# Altium PCB 2009_DFMUX_MEZZANINE_REV4_TIMEMAIL.PCBDOC (part 6 of 6)
Units mil, origin at the board's own origin, x right, y up, seen from the top; angles counter-clockwise.
Board outline 4922.86 x 3627.76 mil, 6 copper layers (Top Layer, Internal Plane 1, Mid-Layer 1, Internal Plane 2, Mid-Layer 2, Bottom Layer); 519 components, 606 nets, 2175 pads, 757 vias.
Unrouted connection lines stored in the file: 148.
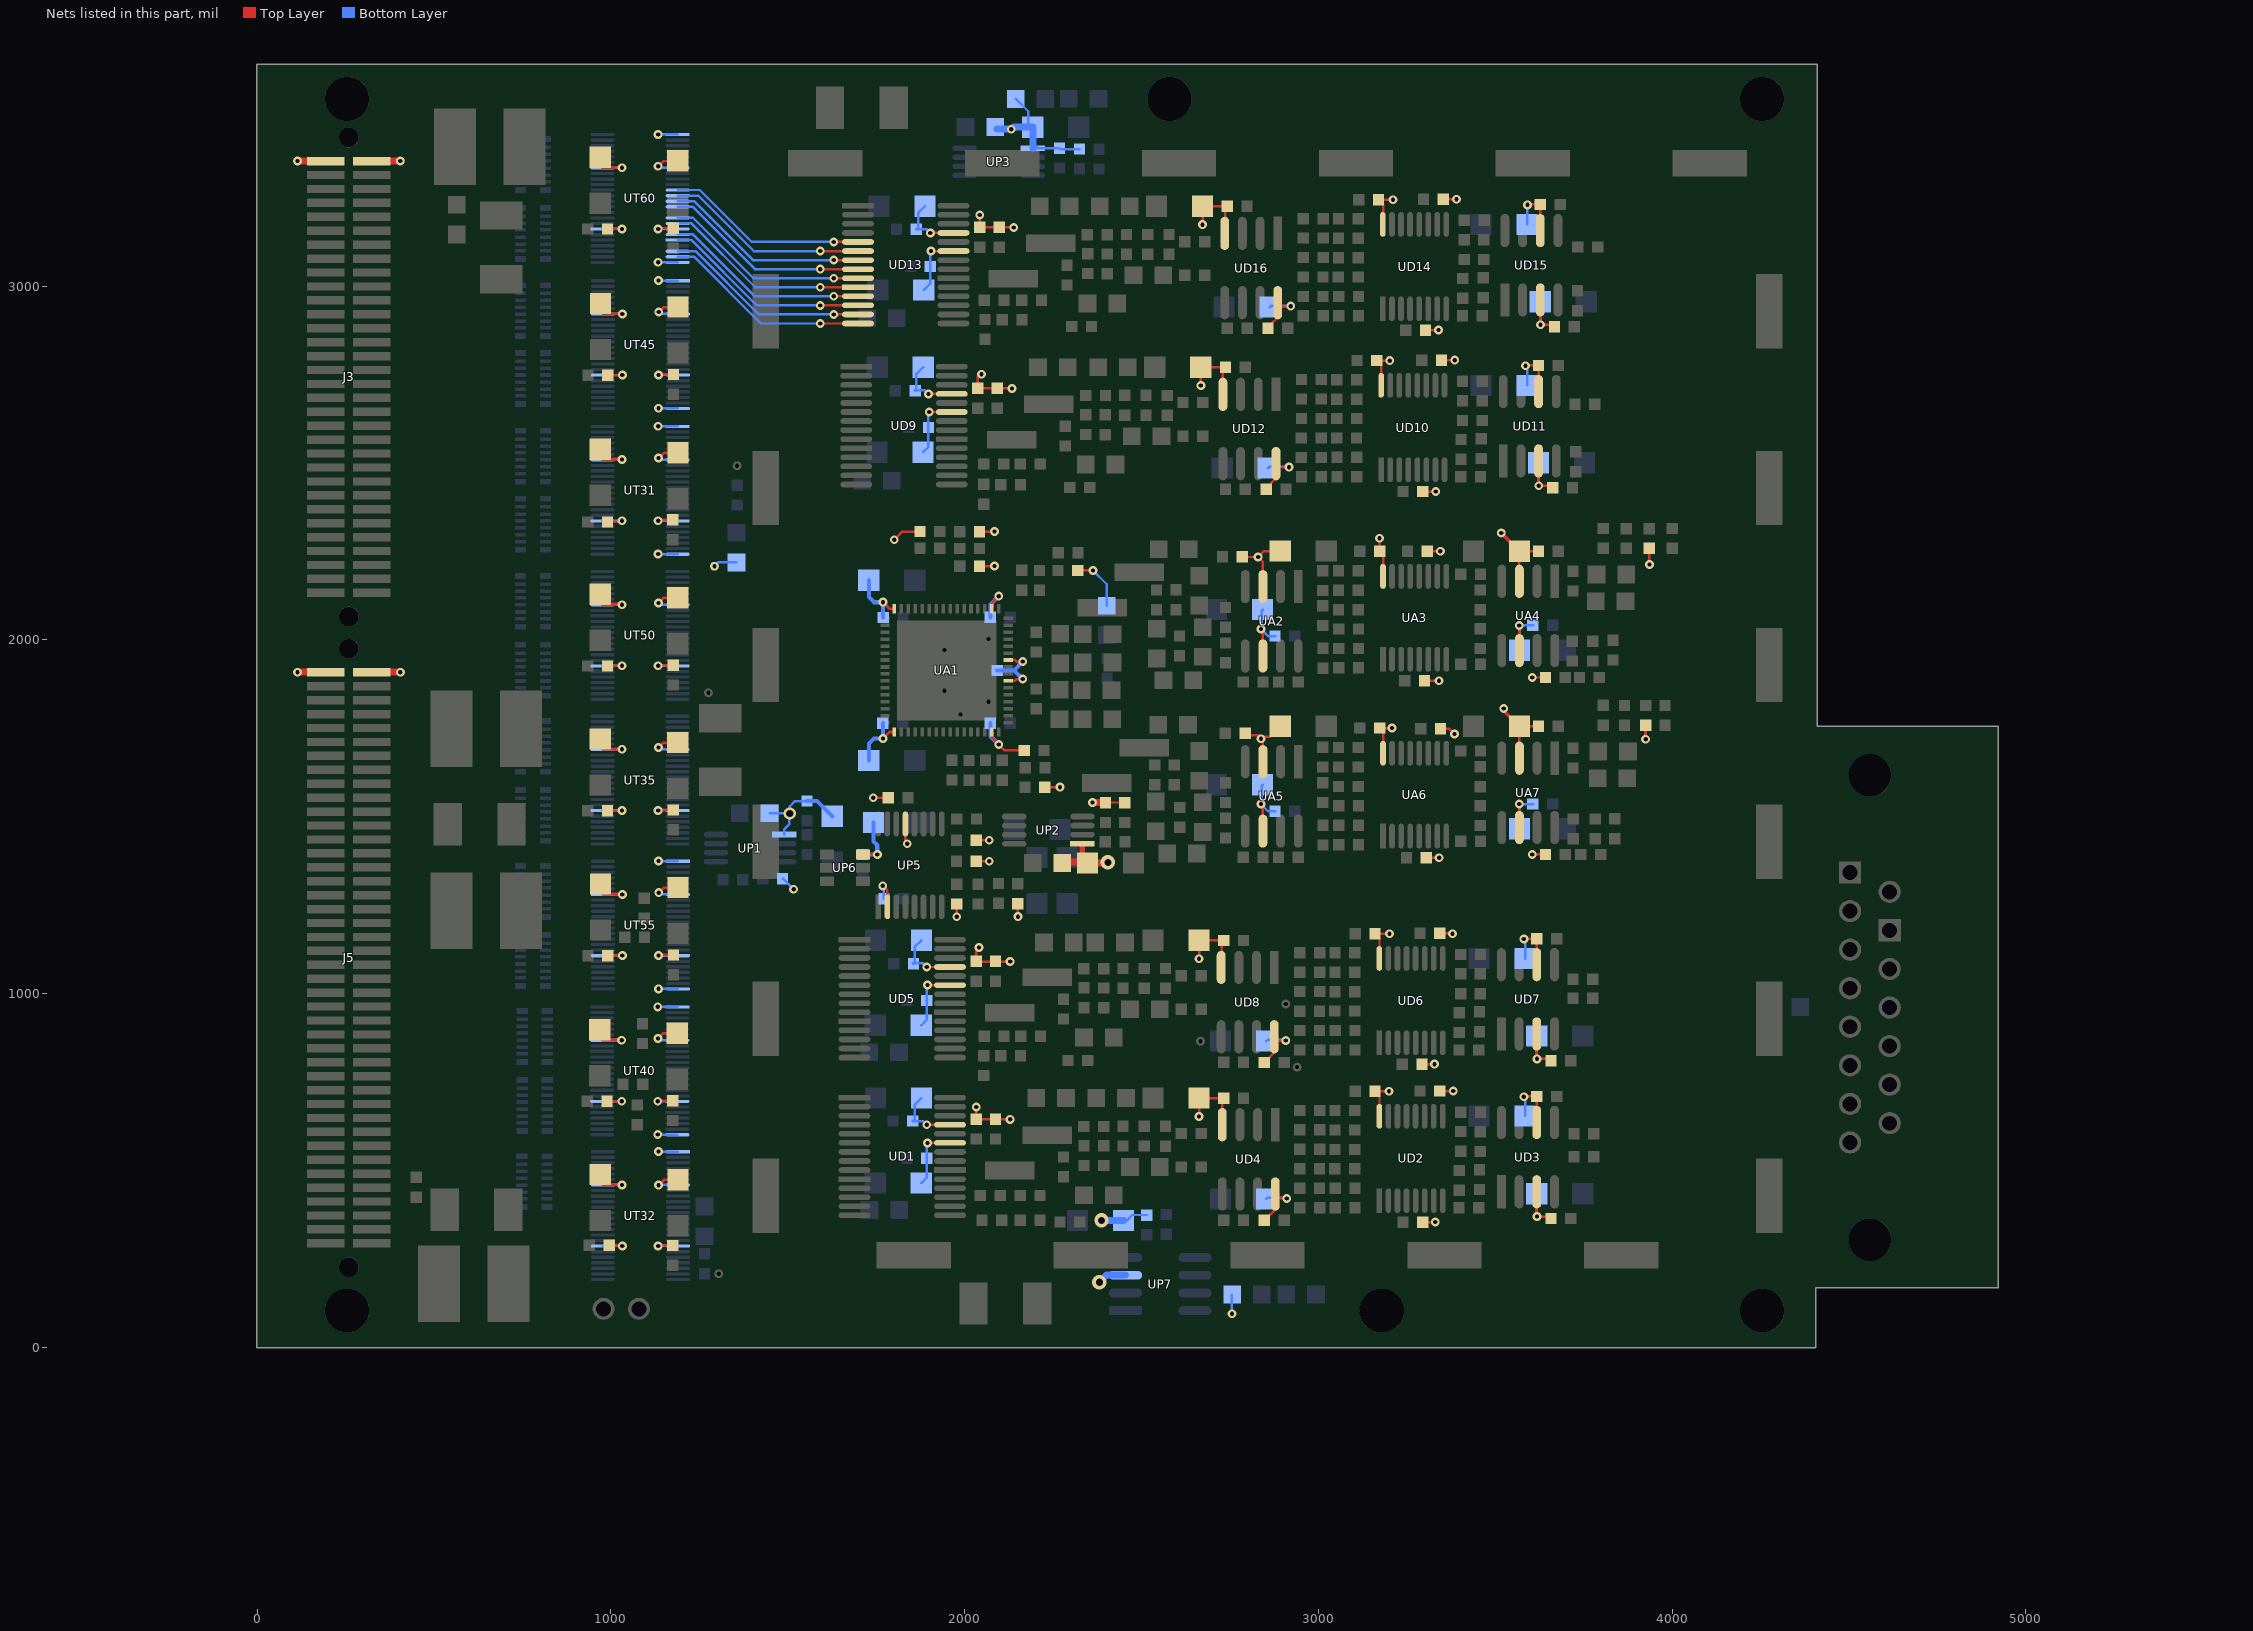
[diagram p10: the nets of this part, all layers, seen from the top]

## Via types
v1: diameter 25, hole 12, Top Layer to Bottom Layer, 692 vias
v2: diameter 40, hole 20, Top Layer to Bottom Layer, 39 vias
v3: diameter 35, hole 20, Top Layer to Bottom Layer, 23 vias
v4: diameter 22, hole 12, Top Layer to Bottom Layer, 3 vias

## Nets (pads, with @x,y where several pads share a name; then routed paths per layer and width w, separated by ;. In a path a pad name is that pad's centre, name@x,y a point inside that pad or via, vN(x,y) a via of type N, cw(c..) or ccw(c..) an arc to the next point about the centre after c; other vN are vias at no path point) (continued)
TRAN4_DATA6: UD13.5 UT60.11 | length 571.3
  Top Layer w7: v1(1630.1,3124.43) UD13.5@1699.03,3124.43
  Bottom Layer w7: UT60.11@1188.63,3271.37 1251.27,3271.37 1398.2,3124.43 v1(1630.1,3124.43)
TRAN4_DATA7: UD13.6 UT60.12 | length 575.4
  Top Layer w7: v1(1591.77,3098.83) UD13.6@1699.03,3098.83
  Bottom Layer w7: UT60.12@1188.63,3255.67 1246.97,3255.67 1403.8,3098.83 v1(1591.77,3098.83)
TRAN4_DATA8: UD13.7 UT60.13 | length 579.5
  Top Layer w7: v1(1630.1,3073.23) UD13.7@1699.03,3073.23
  Bottom Layer w7: UT60.13@1188.63,3239.97 1234.67,3239.97 1401.4,3073.23 v1(1630.1,3073.23)
TRAN4_DATA9: UD13.8 UT60.14 | length 583.6
  Top Layer w7: v1(1591.77,3047.63) UD13.8@1699.03,3047.63
  Bottom Layer w7: UT60.14@1188.63,3224.27 1230.37,3224.27 1407,3047.63 v1(1591.77,3047.63)
TRAN4_DATA10: UD13.9 UT60.16 | length 581.2
  Top Layer w7: v1(1630.1,3022.03) UD13.9@1699.03,3022.03
  Bottom Layer w7: UT60.16@1188.63,3192.87 1231.77,3192.87 1402.6,3022.03 v1(1630.1,3022.03)
TRAN4_DATA11: UD13.10 UT60.17 | length 585.3
  Top Layer w7: v1(1591.77,2996.43) UD13.10@1699.03,2996.43
  Bottom Layer w7: UT60.17@1188.63,3177.17 1227.47,3177.17 1408.2,2996.43 v1(1591.77,2996.43)
TRAN4_DATA12: UD13.11 UT60.19 | length 582.9
  Top Layer w7: v1(1630.1,2970.83) UD13.11@1699.03,2970.83
  Bottom Layer w7: UT60.19@1188.63,3145.77 1231.87,3145.77 1406.8,2970.83 v1(1630.1,2970.83)
TRAN4_DATA13: UD13.12 UT60.20 | length 587
  Top Layer w7: v1(1591.77,2945.23) UD13.12@1699.03,2945.23
  Bottom Layer w7: UT60.20@1188.63,3130.07 1227.57,3130.07 1412.4,2945.23 v1(1591.77,2945.23)
TRAN4_DATA14: UD13.13 UT60.22 | length 584.6
  Top Layer w7: v1(1630.1,2919.63) UD13.13@1699.03,2919.63
  Bottom Layer w7: UT60.22@1188.63,3098.67 1238.97,3098.67 1418,2919.63 v1(1630.1,2919.63)
TRAN4_DATA15: UD13.14 UT60.23 | length 588.7
  Top Layer w7: v1(1591.77,2894.03) UD13.14@1699.03,2894.03
  Bottom Layer w7: UT60.23@1188.63,3082.97 1234.67,3082.97 1423.6,2894.03 v1(1591.77,2894.03)
VCC3VP: CA4.1 CA15.1 CA18.1 CA27.1 CP8.2 CP10.1 CP19.2 DP2.1 RA9.2 RA44.2 RP9.1 RP11.2 RP31.1 UA1.7 UA1.10 UA1.18 UA1.63 UP2.1 UP5.2 | length 1203.7
  Top Layer w7: v1(1768.63,1304.37) 1781.53,1291.47 UP5.2@1781.53,1245.8 ; v1(1977.63,1217) RP31.1@1977.63,1253.37 ; v1(2096.5,1703.91) 2113.05,1687.37 CA27.1@2168.63,1687.37 ; UA1.7@2123.35,1884.11 2141.97,1884.11 2146.77,1888.91 v1(2164.27,1888.91) ; UA1.10@2123.35,1943.17 2141.97,1943.17 2146.77,1938.37 v1(2164.27,1938.37) ; RA44.2@2226.77,1583.37 v1(2269.27,1583.37) ; RP11.2@2276.63,1369 RP11.2@2279.63,1372 ; RA9.2@2320.27,2195.87 v1(2362.77,2195.87) ; CP10.1@2332.63,1371 2347.63,1369 CP10.1@2344.63,1372 ; CP8.2@2397.63,1540 2451.63,1540 RP9.1@2452.63,1539 ; v2(2404.63,1371) v2@2406.63,1369
  Top Layer w8: UA1.63@2077.09,1739.43 2077.09,1723.32 v1(2096.5,1703.91) ; UA1.18@2077.09,2087.85 2077.09,2103.95 v1(2096.5,2123.37)
  Top Layer w15: CP10.1@2332.63,1372 UP2.1@2332.63,1424
  Top Layer w20: RP11.2@2279.63,1372 CP10.1@2332.63,1372 ; CP10.1@2332.63,1371 CP10.1@2332.63,1372 ; CP10.1@2344.63,1372 CP10.1@2332.63,1372 ; CP10.1@2347.63,1369 v2@2406.63,1369 ; v1(2361.63,1540) CP8.2@2397.63,1540
  Bottom Layer w7: v1(1768.63,1304.37) 1771.63,1301.37 CP19.2@1771.63,1268.37 ; v1(2362.77,2195.87) 2401.63,2157 ; 2401.63,2157 2401.63,2096 2401.63,2157
  Bottom Layer w12: CA18.1@2073,1763.91 2073,1727.41 v1(2096.5,1703.91) ; CA4.1@2073,2063.37 2073,2099.87 v1(2096.5,2123.37) ; CA15.1@2091.77,1913.37 2139.81,1913.37 v1(2164.27,1888.91) ; 2139.27,1913.37 v1(2164.27,1938.37)
VCC5VN: CA16.1 CA17.2 CA32.1 CA34.2 CA38.1 CA39.2 CA42.1 CA43.2 CD1.1 CD2.2 CD8.1 CD9.1 CD14.2 CD15.1 CD21.1 CD22.2 CD28.1 CD29.1 CD34.2 CD35.1 CD41.1 CD42.2 CD48.1 CD49.1 CD54.2 CD55.1 CD61.1 CD62.2 CD68.1 CD69.1 CD74.2 CD75.1 CD83.1 CD85.1 CD87.1 CD89.1 CD91.2 CD93.2 CD95.2 CD97.2 CP16.2 DP4.2 RP20.2 RP22.1 UA2.6 UA4.6 UA5.6 UA7.6 UD1.23 UD3.6 UD4.4 UD5.23 UD7.6 UD8.4 UD9.23 UD11.6 UD12.4 UD13.23 UD15.6 UD16.4 UP7.3 | length 4074.5
  Top Layer w7: v1(1895.03,577.83) UD1.23@1959.03,577.83 ; v1(1895.03,1023.83) UD5.23@1959.03,1023.83 ; v1(1905.03,3098.83) UD13.23@1969.03,3098.83 ; RP22.1@2032.63,1433.37 v1(2069.63,1433.37) ; v1(2047.63,2750.37) 2042.57,2750.37 2037.63,2745.43 2037.63,2710.43 2092.63,2710.43 v1(2133.63,2710.43) ; v1(2128.63,644.43) 2087.63,644.43 CD8.1@2032.63,644.43 ; v1(2128.63,1090.43) 2087.63,1090.43 2032.63,1090.43 2032.63,1125.43 v1@2037.57,1130.37 ; v1(2138.63,3165.43) 2097.63,3165.43 CD68.1@2042.63,3165.43 ; v1(2662.63,652.43) 2662.63,704.43 2732.63,704.43 2728.63,700.43 2728.63,630.43 UD4.4@2727.63,629.43 ; v1(2662.63,1098.43) 2662.63,1150.43 2732.63,1150.43 2726.63,1144.43 2726.63,1076 UD8.4@2724.63,1074 ; v1(2667.63,2718.43) 2667.63,2770.43 2737.63,2770.43 2729.63,2762.43 UD12.4@2729.63,2694 ; v1(2672.63,3173.43) 2672.63,3225.43 2742.63,3225.43 2736.63,3219.43 2736.63,3151 UD16.4@2734.63,3149 ; v1(2837.63,1535.43) 2839.63,1535.43 2842.63,1532.43 UA5.6@2842.63,1459.43 ; v1(2837.63,2030.43) 2839.63,2030.43 2842.63,2027.43 UA2.6@2842.63,1954.43 ; UA7.6@3567.63,1465.43 3567.63,1469.43 v1(3567.63,1535.43) v1@3567.63,1540.43 ; v1(3580.63,708.43) 3580.63,709.43 3617.63,709.43 UD3.6@3617.63,635.43 ; v1(3580.63,1154.43) 3580.63,1155.43 3617.63,1155.43 UD7.6@3617.63,1081.43 ; v1(3585.63,2774.43) 3585.63,2775.43 3622.63,2775.43 UD11.6@3622.63,2701.43 ; v1(3590.63,3229.43) 3590.63,3230.43 3627.63,3230.43 UD15.6@3627.63,3156.43 ; CD8.1@2032.63,644.43 v1(2032.63,679.43) CD8.1@2032.63,644.43 ; v1@2037.57,1130.37 v1(2040.63,1130.37) v1@2037.57,1130.37 ; CD68.1@2042.63,3165.43 v1(2042.63,3200.43) CD68.1@2042.63,3165.43 ; v1(1900.03,2643.83) 1964.03,2643.83 v1(1900.03,2643.83) ; UA4.6@3567.63,1969.43 v1(3567.63,2040.43) UA4.6@3567.63,1969.43
  Bottom Layer w7: CD14.2@1877.63,464.43 1892.63,479.43 1892.63,534.43 1892.63,575.43 v1(1895.03,577.83) ; CD34.2@1877.63,910.43 1892.63,925.43 1892.63,980.43 1892.63,1021.43 v1(1895.03,1023.83) ; CD54.2@1882.63,2530.43 1897.63,2545.43 1897.63,2600.43 1897.63,2641.43 v1(1900.03,2643.83) ; CD74.2@1884.63,2989 1902.63,3007 1902.63,3055.43 1902.63,3096.43 v1(1905.03,3098.83) ; CP16.2@2449.63,359 2458.63,359 2473.63,374 RP20.2@2514.63,374 ; v1(2755.63,95) DP4.2@2755.63,149 ; CA34.2@2842.63,1590.43 2839.63,1587.43 2839.63,1537.43 v1(2837.63,1535.43) ; CA17.2@2842.63,2085.43 2839.63,2082.43 2839.63,2032.43 v1(2837.63,2030.43) ; CA32.1@2877.63,1515.43 2857.63,1515.43 ; CA16.1@2877.63,2010.43 2857.63,2010.43 ; CA43.2@3567.63,1465.43 v1(3567.63,1535.43) CA42.1@3606.63,1535.43 ; CA39.2@3567.63,1970.43 v1(3567.63,2040.43) CA38.1@3606.63,2040.43 ; v1@3580.63,709.43 v1(3580.63,708.43) 3579.63,708.43 3579.63,704 3584.63,699 CD91.2@3584.63,654 ; v1@3580.63,1155.43 v1(3580.63,1154.43) 3579.63,1154.43 3579.63,1149 3584.63,1144 CD93.2@3584.63,1099 ; v1@3585.63,2775.43 v1(3585.63,2774.43) 3589.2,2774.43 3589.63,2774 CD95.2@3589.63,2719 ; CD97.2@3589.63,3174 3589.63,3229.43 v1(3590.63,3229.43) ; v1(2837.63,1535.43) 2857.63,1515.43 ; v1(2837.63,1535.43) 2857.63,1515.43 ; v1(2837.63,2030.43) 2857.63,2010.43 ; v1(2837.63,2030.43) 2857.63,2010.43
  Bottom Layer w20: v2(2380.63,184) 2400.63,204 UP7.3@2454.63,204 ; v2(2386.63,359) CP16.2@2449.63,359
VCC5VP: CA3.1 CA5.1 CA23.1 CA24.1 CA36.1 CA37.1 CA40.1 CA41.1 CD3.1 CD4.2 CD6.1 CD19.1 CD20.1 CD23.1 CD24.2 CD26.1 CD39.1 CD40.1 CD43.1 CD44.2 CD46.1 CD59.1 CD60.1 CD63.1 CD64.2 CD66.1 CD79.1 CD80.1 CD81.1 CD82.1 CD84.1 CD86.1 CD88.1 CD90.1 CD92.1 CD94.1 CD96.1 CD98.1 CP11.1 CP14.1 DP3.1 pad.1@2907.63,867 pad.1@3517,2302 RA10.1 RA30.1 RA31.1 RA55.1 RD1.1 RD29.1 RD31.1 RD59.1 RD61.1 RD89.1 RD91.1 RD119.1 RP14.1 RP16.2 RP21.1 RP25.2 RP30.1 RP32.2 RP54.2 RP57.2 UA2.3 UA3.16 UA4.3 UA5.3 UA6.16 UA7.3 UD1.25 UD2.16 UD3.3 UD4.8 UD5.25 UD6.16 UD7.3 UD8.8 UD9.25 UD10.16 UD11.3 UD12.8 UD13.25 UD14.16 UD15.3 UD16.8 UP3.1 | length 6111.9
  Top Layer w7: v1(1893.03,629.03) UD1.25@1959.03,629.03 ; v1(1898.03,2695.03) UD9.25@1964.03,2695.03 ; v1(1903.03,3150.03) UD13.25@1969.03,3150.03 ; RP21.1@2032.63,1374 v1(2069.63,1374) ; CA5.1@2784.63,2234 v1(2829.63,2234) ; CA24.1@2792.63,1735.43 2797.63,1730.43 2828.63,1730.43 v1@2837.63,1721.43 ; v1(2837.63,1720.43) v1@2837.63,1721.43 ; UA2.3@2842.63,2150.43 2842.63,2221 v1(2829.63,2234) ; CD40.1@2847.63,805.43 2883.63,841.43 UD8.8@2883.63,868 ; CD80.1@2857.63,2880.43 2857.63,2884 2893.63,2920 UD16.8@2893.63,2943 ; CA23.1@2892.63,1755.43 2862.63,1725.43 2839.63,1725.43 2842.63,1722.43 v1@2842.63,1720.43 ; CA3.1@2892.63,2250.43 2846.07,2250.43 v1(2829.63,2234) ; pad.1@2907.63,867 2884.63,867 UD8.8@2883.63,868 ; v1(2916.63,2488) 2915.63,2487 2889.63,2487 UD12.8@2888.63,2488 ; v1(2921.63,2943) 2920.63,2942 2894.63,2942 UD16.8@2893.63,2943 ; UD2.16@3172.63,653.02 3172.63,711 CD6.1@3159.63,724 ; UD6.16@3172.63,1099.02 3172.63,1156 3159.63,1169 v1(3200.63,1169) ; UD10.16@3177.63,2719.02 3177.63,2776 CD46.1@3164.63,2789 ; UA6.16@3182.63,1679.68 3182.63,1740.43 3172.63,1750.43 v1(3208.2,1750.43) ; UA3.16@3182.63,2179.68 3182.63,2240.43 CD81.1@3172.63,2250.43 ; UD14.16@3182.63,3174.02 3182.63,3231 3169.63,3244 v1(3210.63,3244) ; RD29.1@3294.63,354 v1(3330.2,354) ; RA30.1@3299.63,1884 v1(3340.63,1884) ; v1@3340.63,1384.57 v1(3341.2,1384) ; RD91.1@3352.63,3245.43 v1(3390.2,3245.43) v1@3388.63,3247 ; UA7.3@3567.63,1665.43 3567.63,1755.43 CA41.1@3622.63,1755.43 ; UA4.3@3567.63,2165.43 3567.63,2250.43 CA37.1@3622.63,2250.43 ; UD3.3@3617.63,439.43 v1(3617.63,369.43) 3652.63,369.43 CD84.1@3657.63,364.43 ; UD7.3@3617.63,885.43 v1(3617.63,815.43) 3652.63,815.43 CD86.1@3657.63,810.43 ; UD11.3@3622.63,2505.43 v1(3622.63,2435.43) 3657.63,2435.43 CD88.1@3662.63,2430.43 ; UD15.3@3627.63,2960.43 v1(3627.63,2890.43) 3662.63,2890.43 CD90.1@3667.63,2885.43 ; v1@2837.63,1721.43 2837.63,1722.43 2839.63,1720.43 v1@2842.63,1720.43 ; v1@2842.63,1720.43 2842.63,1655.43 v1@2842.63,1720.43 ; CD20.1@2847.63,359.43 2883.63,395.43 UD4.8@2883.63,426.43 ; CD20.1@2847.63,359.43 UD4.8@2886.63,396.87 ; CD20.1@2847.63,359.43 UD4.8@2886.63,396.87 ; CD60.1@2852.63,2429 2888.63,2465 UD12.8@2888.63,2488 ; CD60.1@2852.63,2429 2852.63,2425.43 CD60.1@2852.63,2429 ; UD8.8@2874.63,878 UD8.8@2881.2,878 ; UD8.8@2874.63,878 UD8.8@2881.2,878 ; UD8.8@2874.63,878 2875.63,877 2875.63,876 UD8.8@2883.63,868 ; UD4.8@2877.63,433.43 2878.63,432.43 UD4.8@2878.63,431.43 ; UD4.8@2877.63,433.43 UD4.8@2884.2,433.43 ; UD4.8@2877.63,433.43 UD4.8@2884.2,433.43 ; UD4.8@2877.63,433.43 2877.63,432.43 UD4.8@2878.63,431.43 ; UD4.8@2878.63,431.43 UD4.8@2883.63,426.43 ; UD12.8@2879.63,2498 UD12.8@2880.63,2497 ; UD12.8@2879.63,2498 2879.63,2497 UD12.8@2880.63,2496 ; UD12.8@2879.63,2498 UD12.8@2880.63,2497 ; UD12.8@2879.63,2498 2886.2,2498 2887.63,2499.43 2887.63,2498.43 2888.63,2497.43 UD12.8@2888.63,2489 ; UD12.8@2880.63,2496 UD12.8@2880.63,2497 ; UD12.8@2880.63,2496 UD12.8@2888.63,2488 ; UD12.8@2880.63,2497 UD12.8@2888.63,2489 ; UD8.8@2881.2,878 UD8.8@2882.63,879.43 ; UD8.8@2882.63,879.43 2883.63,878.43 UD8.8@2883.63,877.43 ; UD8.8@2882.63,879.43 2882.63,878.43 UD8.8@2883.63,877.43 ; UD4.8@2883.63,426.43 UD4.8@2886.63,423.43 ; UD8.8@2883.63,868 UD8.8@2883.63,877.43 ; UD4.8@2884.2,433.43 2885.63,434.87 2886.63,433.87 UD4.8@2886.63,423.43 ; UD16.8@2884.63,2953 2884.63,2952 UD16.8@2893.63,2943 ; UD16.8@2884.63,2953 UD16.8@2893.63,2944 ; UD16.8@2884.63,2953 2891.2,2953 2892.63,2954.43 2892.63,2953.43 2893.63,2952.43 UD16.8@2893.63,2944 ; UD16.8@2884.63,2953 UD16.8@2893.63,2944 ; UD4.8@2886.63,396.87 UD4.8@2886.63,421 ; UD4.8@2886.63,421 UD4.8@2886.63,423.43 ; UD4.8@2886.63,421 2907.63,421 UD4.8@2886.63,421 ; UD12.8@2888.63,2488 UD12.8@2888.63,2489 ; UD16.8@2893.63,2943 UD16.8@2893.63,2944 ; CD6.1@3159.63,724 v1(3199.63,724) CD6.1@3159.63,724 ; CD46.1@3164.63,2789 v1(3201.63,2789) CD46.1@3164.63,2789 ; CD81.1@3172.63,2250.43 v1(3172.63,2287) CD81.1@3172.63,2250.43 ; RD59.1@3292.63,800.43 v1(3328.2,800.43) ; RD59.1@3292.63,800.43 v1(3328.2,800.43) ; RD59.1@3292.63,800.43 v1(3328.2,800.43) ; v1(3341.2,1384) 3304.63,1384 v1(3341.2,1384) ; 3369.63,1749 v1(3384.63,1734) 3369.63,1749 ; 3369.63,1749 3344.63,1749 3369.63,1749 ; v1@3377.2,1170.43 v1(3378.63,1169) v1@3377.2,1170.43 ; v1@3377.2,1170.43 3342.63,1170.43 v1@3377.2,1170.43 ; v1(3385.2,2790.43) 3383.63,2792 v1(3385.2,2790.43) ; v1(3385.2,2790.43) 3347.63,2790.43 v1(3385.2,2790.43) ; v1(1893.03,1075.03) 1959.03,1075.03 v1(1893.03,1075.03) ; v1(2150.63,1217.37) 2150.63,1254.37 v1(2150.63,1217.37) ; RD89.1@3294.63,2419 v1(3331.63,2419) RD89.1@3294.63,2419 ; RD119.1@3302.63,2875.43 v1(3339.63,2875.43) RD119.1@3302.63,2875.43 ; RA10.1@3307.63,2250.43 v1(3344.63,2250.43) RA10.1@3307.63,2250.43 ; RD1.1@3342.63,724.43 v1(3381.2,724.43) RD1.1@3342.63,724.43 ; v1(3604.63,1393.37) 3641.63,1393.37 v1(3604.63,1393.37) ; v1(3604.63,1893.37) 3641.63,1893.37 v1(3604.63,1893.37)
  Top Layer w8: v1(3925,1719) RP57.2@3925,1758 ; RP54.2@3935,2258 3935,2214 v1(3936,2213) v1@3936,2215
  Top Layer w10: pad.1@3517,2302 3567.63,2251.37 CA36.1@3567.63,2250.43 ; v1(3524,1806) 3524,1799.07 CA40.1@3567.63,1755.43
  Bottom Layer w7: CD3.1@1877.63,704.43 1858.63,685.43 1858.63,644.37 1853.63,639.37 1858.57,639.37 1858.63,639.43 1882.63,639.43 v1(1893.03,629.03) ; CD23.1@1877.63,1150.43 1858.63,1131.43 1858.63,1087 CD24.2@1857,1085.37 ; CD43.1@1882.63,2770.43 1863.63,2751.43 1863.63,2707 CD44.2@1862,2705.37 ; CD63.1@1887.63,3225.43 1868.63,3206.43 1868.63,3165.37 1863.63,3160.37 1868.57,3160.37 1868.63,3160.43 1892.63,3160.43 v1(1903.03,3150.03) ; v1(1893.03,1075.03) 1882.63,1085.43 1858.63,1085.43 1858.57,1085.37 CD24.2@1857,1085.37 ; v1(1898.03,2695.03) 1887.7,2705.37 CD44.2@1862,2705.37 ; RP16.2@2086.63,3449 RP16.2@2091.63,3444 ; v1(2131.63,3443) 2132.63,3444 v1@2137.63,3449 ; DP3.1@2144.63,3529 2179.63,3494 CP14.1@2179.63,3449 ; 2192.63,3404 2207.63,3389 2267.63,3389 2269.63,3387 RP14.1@2324.63,3387 ; CD19.1@2852.63,419.43 2856.63,423.43 2910.63,423.43 v1(2910.63,421) v1@2907.63,421 ; CD59.1@2857.63,2485.43 2861.63,2489.43 2915.63,2489.43 v1@2916.63,2488.43 ; CD79.1@2862.63,2940.43 2866.63,2944.43 2920.63,2944.43 v1@2921.63,2943.43 ; CD24.2@1855.63,1084 1855,1084 1853.63,1085.37 CD24.2@1857,1085.37 ; CD24.2@1855.63,1084 CD24.2@1857,1085.37 ; CD24.2@1855.63,1084 CD24.2@1857,1085.37 ; CD44.2@1860.63,2704 1860,2704 1858.63,2705.37 CD44.2@1862,2705.37 ; CD44.2@1860.63,2704 CD44.2@1862,2705.37 ; CD44.2@1860.63,2704 CD44.2@1862,2705.37 ; CD39.1@2856.63,869.43 2910.63,869.43 pad.1@2910.63,867 ; CD39.1@2856.63,869.43 2852.63,865.43 CD39.1@2856.63,869.43 ; pad.1@2910.63,867 pad.1@2907.63,867 pad.1@2910.63,867 ; v1@2916.63,2488.43 v1(2916.63,2488) v1@2916.63,2488.43 ; v1@2921.63,2943.43 v1(2921.63,2943) v1@2921.63,2943.43 ; v1(3617.63,369.43) 3617.63,434.43 v1(3617.63,369.43) ; v1(3617.63,815.43) 3617.63,880.43 v1(3617.63,815.43) ; v1(3622.63,2435.43) 3622.63,2500.43 v1(3622.63,2435.43) ; v1(3627.63,2890.43) 3627.63,2955.43 v1(3627.63,2890.43)
  Bottom Layer w20: RP16.2@2091.63,3444 v1@2132.63,3444 ; v1@2137.63,3449 2179.63,3449 2192.63,3449 2192.63,3404 ; 2192.63,3404 2192.63,3389 2192.63,3404
VDD3V: CA7.2 CA25.1 CA44.1 CA45.1 CP4.2 CP7.1 CP21.1 CP22.2 CT27.1 CT28.2 CT31.1 CT32.2 CT33.1 CT34.2 CT37.1 CT38.2 CT41.1 CT42.2 CT45.1 CT46.2 CT49.1 CT50.2 CT53.1 CT54.2 DP1.1 pad.1@1292.63,2208 RA2.1 RA4.1 RA6.1 RA56.1 RP5.1 RP7.2 UA1.32 UA1.49 UP1.1 UP5.13 UP6.3 UT31.1 UT31.7 UT31.18 UT31.24 UT32.1 UT32.7 UT32.18 UT35.7 UT35.18 UT40.1 UT40.7 UT40.18 UT40.24 UT45.1 UT45.7 UT45.18 UT45.24 UT50.7 UT50.18 UT55.1 UT55.7 UT55.18 UT55.24 UT60.1 UT60.7 UT60.18 UT60.24 | length 5036.1
  Top Layer w7: v1@1132.63,872.37 1147.63,887.37 ; v1(1133.43,873.17) 1147.63,887.37 ; v1@1133.63,695.37 v1@1135.63,697.37 ; v1@1133.63,1694.37 1148.63,1709.37 ; v1(1133.63,3161.47) 1135.53,3163.37 CT54.2@1175.63,3163.37 ; v1@1134.43,3339.17 1148.63,3353.37 ; v1@1134.63,1517.37 v1@1136.63,1519.37 ; v1(1134.63,2748.47) 1136.53,2750.37 CT42.2@1176.63,2750.37 ; v1(1135.43,1285.17) 1149.63,1299.37 ; v1(1135.43,2926.17) 1149.63,2940.37 ; v1@1135.63,1107.37 v1@1137.63,1109.37 ; CT49.1@1189.63,1299.37 1149.63,1299.37 ; CT41.1@1189.63,2940.37 1149.63,2940.37 ; v1(1741.77,1553.37) RA56.1@1784.27,1553.37 ; v1(1801.13,2282.93) 1823.73,2305.87 RA6.1@1874.27,2305.87 ; UP5.13@1832.7,1480.05 1832.7,1428.3 v1(1837.63,1423.37) ; RA2.1@2041.77,2208.37 v1(2084.27,2208.37) ; RA4.1@2041.77,2305.87 v1(2084.27,2305.87) ; v1@1135.63,288.37 v1(1133.63,286.37) v1@1135.63,288.37 ; v1@1135.63,288.37 1174.63,288.37 v1@1135.63,288.37 ; v1@1135.63,697.37 1174.63,697.37 v1@1135.63,697.37 ; v1@1136.63,1519.37 1175.63,1519.37 v1@1136.63,1519.37 ; v1@1136.63,1928.37 1175.63,1928.37 v1@1136.63,1928.37 ; v1@1136.63,1928.37 1134.63,1926.37 v1@1136.63,1928.37 ; v1@1136.63,2339.37 1133.63,2336.37 v1@1136.63,2339.37 ; v1@1136.63,2339.37 1174.63,2339.37 v1@1136.63,2339.37 ; v1@1137.63,1109.37 1176.63,1109.37 v1@1137.63,1109.37 ; 1147.63,887.37 1187.63,887.37 1147.63,887.37 ; 1148.63,1709.37 v1(1134.43,1695.17) 1148.63,1709.37 ; 1148.63,1709.37 1188.63,1709.37 1148.63,1709.37 ; 1148.63,2118.37 v1(1134.43,2104.17) 1148.63,2118.37 ; 1148.63,2118.37 1188.63,2118.37 1148.63,2118.37 ; 1148.63,3353.37 1188.63,3353.37 1148.63,3353.37 ; 1149.63,473.37 1189.63,473.37 1149.63,473.37 ; 1149.63,473.37 v1(1134.63,458.37) 1149.63,473.37 ; 1149.63,1299.37 1134.63,1284.37 1149.63,1299.37 ; 1149.63,2940.37 1134.63,2925.37 1149.63,2940.37 ; 1150.63,2528.37 1189.63,2528.37 1150.63,2528.37 ; 1150.63,2528.37 1132.63,2510.37 1150.63,2528.37 ; UP6.3@1712.63,1393.37 v1(1753.27,1393.37) UP6.3@1712.63,1393.37
  Top Layer w8: v1(1769.27,1720.87) 1787.83,1739.43 UA1.49@1801.5,1739.43 ; v1(1769.27,2106.41) 1787.83,2087.85 UA1.32@1801.5,2087.85
  Bottom Layer w7: v1@1130.03,962.37 v1(1132.63,962.37) ; v1@1131.03,3428.37 v1(1133.63,3428.37) ; v1@1132.03,1374.37 v1(1134.63,1374.37) ; v1@1132.03,3015.37 v1(1134.63,3015.37) ; v1(1132.63,601.27) UT40.24@1187.63,601.27 ; v1@1132.63,2510.37 1133.83,2509.17 UT31.7@1188.63,2509.17 ; v1(1133.43,873.17) 1138.47,868.17 UT40.7@1187.63,868.17 ; v1(1133.63,286.37) 1133.73,286.47 UT32.18@1189.63,286.47 ; v1@1133.63,695.37 1133.73,695.47 UT40.18@1187.63,695.47 ; v1@1133.63,2103.37 v1(1134.43,2104.17) ; v1@1133.63,2336.37 1133.73,2336.47 UT31.18@1188.63,2336.47 ; v1(1133.63,3338.37) v1@1134.43,3339.17 ; v1(1134.43,1695.17) 1139.47,1690.17 UT35.7@1188.63,1690.17 ; v1(1134.43,2104.17) 1139.47,2099.17 UT50.7@1188.63,2099.17 ; v1@1134.47,3339.17 1139.47,3334.17 UT60.7@1188.63,3334.17 ; v1(1134.63,458.37) 1135.43,459.17 UT32.7@1189.63,459.17 ; v1@1134.63,1284.37 v1(1135.43,1285.17) ; v1@1134.63,1517.37 1134.73,1517.47 UT35.18@1188.63,1517.47 ; v1@1134.63,1926.37 1134.73,1926.47 UT50.18@1188.63,1926.47 ; v1@1134.63,2925.37 v1(1135.43,2926.17) ; v1(1135.43,1285.17) 1140.47,1280.17 UT55.7@1189.63,1280.17 ; v1(1135.43,2926.17) 1140.47,2921.17 UT45.7@1189.63,2921.17 ; v1@1135.63,1107.37 1135.73,1107.47 UT55.18@1189.63,1107.47 ; UT31.24@1188.63,2242.27 v1@1133.73,2242.27 ; pad.1@1292.63,2208 1303.63,2219 DP1.1@1354.63,2219 ; CP4.2@1485.63,1324 1487.63,1324 v1(1516.63,1295) ; UP1.1@1489.63,1449 1489.63,1464 1504.63,1479 v3@1504.63,1509 ; RP5.1@1554.63,1544 1520.63,1544 1505.63,1529 v3(1505.63,1509) ; v1(1132.63,962.37) 1187.63,962.37 v1(1132.63,962.37) ; v1(1133.63,3161.47) UT60.18@1188.63,3161.47 ; v1(1133.63,3161.47) UT60.18@1188.63,3161.47 ; v1(1133.63,3161.47) UT60.18@1188.63,3161.47 ; v1(1133.63,3428.37) 1188.63,3428.37 v1(1133.63,3428.37) ; v1@1133.73,2242.27 1133.63,2242.37 v1@1133.73,2242.27 ; v1(1134.63,1374.37) 1189.63,1374.37 v1(1134.63,1374.37) ; v1(1134.63,2748.47) UT45.18@1189.63,2748.47 ; v1(1134.63,2748.47) UT45.18@1189.63,2748.47 ; v1(1134.63,2748.47) UT45.18@1189.63,2748.47 ; v1(1134.63,3015.37) 1189.63,3015.37 v1(1134.63,3015.37) ; v3@1503.63,1509 v3@1504.63,1509 ; v3@1503.63,1509 1448.63,1509 v3@1503.63,1509 ; v3@1503.63,1509 1504.63,1510 v3(1505.63,1509) ; v3@1504.63,1509 v3(1505.63,1509) ; v1@1132.63,2603.37 1188.63,2603.37 v1@1132.63,2603.37 ; v1(1133.63,3067.27) 1188.63,3067.27 v1(1133.63,3067.27) ; v1(1134.63,553.37) 1189.63,553.37 v1(1134.63,553.37) ; v1(1134.63,1013.27) 1189.63,1013.27 v1(1134.63,1013.27) ; v1(1134.63,2654.27) 1189.63,2654.27 v1(1134.63,2654.27)
  Bottom Layer w12: RP5.1@1554.63,1544 1582.73,1544 CP7.1@1625.93,1500.8 ; CP22.2@1712.63,1393.37 v1(1753.27,1393.37) 1753.27,1419.37 1742.63,1430 CP21.1@1742.63,1483.37 ; CA45.1@1729.27,1658.91 1729.27,1706.41 1743.73,1720.87 v1(1769.27,1720.87) CA25.1@1769.27,1763.91 ; CA44.1@1729.27,2168.37 1729.27,2120.87 1743.73,2106.41 v1(1769.27,2106.41) CA7.2@1769.27,2063.37
  other v1: 1132.63,695.47 1134.63,1107.47 1133.63,1517.47 1133.63,1926.47 1133.63,2242.27 1133.63,2336.47 1134.43,2514.17 1133.63,2603.37
VDD_EXT: CT25.1 CT26.2 CT29.1 CT30.2 CT35.1 CT36.2 CT39.1 CT40.2 CT43.1 CT44.2 CT47.1 CT48.2 CT51.1 CT52.2 CT55.1 CT56.2 J3.1 J3.2 J5.1 J5.2 pad.1@114.33,3353.43 pad.1@404.85,3353.43 UT31.31 UT31.42 UT32.31 UT32.42 UT35.31 UT35.42 UT40.31 UT40.42 UT45.31 UT45.42 UT50.31 UT50.42 UT55.31 UT55.42 UT60.31 UT60.42 | length 3206.9
  Top Layer w7: CT55.1@969.63,3363.37 996.63,3336.37 v1@1026.75,3336.37 ; CT39.1@975.63,868.37 v1@1030.63,868.37 ; CT35.1@976.63,1690.37 v1(1031.63,1690.37) ; CT47.1@976.63,2099.37 v1@1031.63,2099.37 ; CT25.1@976.63,2509.37 v1(1031.63,2509.37) ; CT55.1@976.63,3334.37 v1(1031.63,3334.37) ; CT51.1@977.63,1280.37 v1@1032.63,1280.37 ; CT43.1@977.63,2921.37 v1@1032.63,2921.37 ; CT40.2@989.63,695.37 1030.63,695.37 v1(1030.63,695.67) ; CT36.2@990.63,1517.37 1031.63,1517.37 v1@1031.63,1517.67 ; CT48.2@990.63,1926.37 1031.63,1926.37 v1(1031.63,1926.67) ; CT26.2@990.63,2333.37 1028.33,2333.37 v1(1031.63,2336.67) ; CT56.2@990.63,3161.37 1031.63,3161.37 v1@1031.63,3161.67 ; CT52.2@991.63,1107.37 1032.63,1107.37 v1@1032.63,1107.67 ; CT44.2@991.63,2748.37 1032.63,2748.37 v1@1032.63,2748.67 ; v1@1032.63,459.37 v1@1031.63,459.37 ; CT39.1@995.63,870.37 v1@1025.75,870.37 ; CT39.1@995.63,870.37 968.63,897.37 CT39.1@995.63,870.37 ; CT35.1@996.63,1692.37 v1@1026.75,1692.37 ; CT35.1@996.63,1692.37 969.63,1719.37 CT35.1@996.63,1692.37 ; CT47.1@996.63,2101.37 v1@1026.75,2101.37 ; CT47.1@996.63,2101.37 969.63,2128.37 CT47.1@996.63,2101.37 ; CT25.1@996.63,2511.37 v1@1026.75,2511.37 ; CT25.1@996.63,2511.37 969.63,2538.37 CT25.1@996.63,2511.37 ; CT29.1@997.63,461.37 996.63,461.37 969.63,488.37 CT29.1@997.63,461.37 ; CT29.1@997.63,461.37 1029.63,461.37 v1@1031.63,459.37 ; CT51.1@997.63,1282.37 v1@1027.75,1282.37 ; CT51.1@997.63,1282.37 970.63,1309.37 CT51.1@997.63,1282.37 ; CT43.1@997.63,2923.37 v1@1027.75,2923.37 ; CT43.1@997.63,2923.37 970.63,2950.37 CT43.1@997.63,2923.37 ; v1@1025.75,870.37 1030.63,868.07 v1@1030.63,868.37 ; v1@1025.75,870.37 1028.63,870.37 v1@1030.63,868.37 ; v1@1026.75,1692.37 1031.63,1690.07 v1(1031.63,1690.37) ; v1@1026.75,1692.37 1029.63,1692.37 v1(1031.63,1690.37) ; v1@1026.75,2101.37 1031.63,2099.07 v1@1031.63,2099.37 ; v1@1026.75,2101.37 1029.63,2101.37 v1@1031.63,2099.37 ; v1@1026.75,2511.37 1031.63,2509.07 v1(1031.63,2509.37) ; v1@1026.75,2511.37 1029.63,2511.37 v1(1031.63,2509.37) ; v1@1026.75,3336.37 v1@1031.63,3334.07 ; v1@1026.75,3336.37 1029.63,3336.37 v1(1031.63,3334.37) ; v1@1027.75,1282.37 1032.63,1280.07 v1@1032.63,1280.37 ; v1@1027.75,1282.37 1030.63,1282.37 v1@1032.63,1280.37 ; v1@1027.75,2923.37 1032.63,2921.07 v1@1032.63,2921.37 ; v1@1027.75,2923.37 1030.63,2923.37 v1@1032.63,2921.37 ; v1@1031.63,459.37 977.63,459.37 v1@1031.63,459.37 ; v1@1031.63,3334.07 v1(1031.63,3334.37) ; v1@1031.63,3334.07 v1(1031.63,3334.37) ; v1@1032.63,286.67 1032.63,286.37 995.63,288.37 v1@1036.03,288.37 ; v1@1032.63,286.67 v1@1036.03,288.37 ; v1@1032.63,286.67 v1@1036.03,288.37
  Top Layer w20: v1(114.33,1908.37) J5.1@194.63,1908.37 ; pad.1@114.33,3353.43 J3.1@194.63,3353.43 ; J5.2@324.55,1908.37 v1(404.85,1908.37) ; J3.2@324.55,3353.43 pad.1@404.85,3353.43
  Bottom Layer w7: UT40.42@975.03,868.17 v1(1030.43,868.17) ; UT35.31@976.03,1517.47 v1(1031.43,1517.47) ; UT35.42@976.03,1690.17 v1@1031.43,1690.17 ; UT50.42@976.03,2099.17 v1(1031.43,2099.17) ; UT31.31@976.03,2336.47 v1@1031.43,2336.47 ; UT31.42@976.03,2509.17 v1@1031.43,2509.17 ; UT60.31@976.03,3161.47 v1(1031.43,3161.47) ; UT60.42@976.03,3334.17 1031.43,3334.17 v1(1031.63,3334.37) ; UT32.31@977.03,286.47 v1(1032.43,286.47) v1@1032.63,286.67 ; UT55.42@977.03,1280.17 v1(1032.43,1280.17) ; UT45.31@977.03,2748.47 v1(1032.43,2748.47) ; UT45.42@977.03,2921.17 v1(1032.43,2921.17) ; v1(1030.63,695.67) v1@1030.43,695.47 ; v1(1031.63,1926.67) v1@1031.43,1926.47 ; v1@1032.63,1107.67 v1(1032.43,1107.47) ; v1@1030.43,695.47 975.03,695.47 v1@1030.43,695.47 ; v1(1030.43,868.17) 1030.63,868.37 v1(1030.43,868.17) ; v1(1031.43,459.17) v1@1032.43,459.17 ; v1(1031.43,459.17) 977.03,459.17 v1(1031.43,459.17) ; v1(1031.43,459.17) 1031.63,459.37 v1@1032.63,459.37 ; v1(1031.43,1517.47) 1031.63,1517.67 v1(1031.43,1517.47) ; v1@1031.43,1690.17 v1(1031.63,1690.37) v1@1031.43,1690.17 ; v1@1031.43,1926.47 976.03,1926.47 v1@1031.43,1926.47 ; v1(1031.43,2099.17) 1031.63,2099.37 v1(1031.43,2099.17) ; v1@1031.43,2336.47 v1(1031.63,2336.67) v1@1031.43,2336.47 ; v1@1031.43,2509.17 v1(1031.63,2509.37) v1@1031.43,2509.17 ; v1(1031.43,3161.47) 1031.63,3161.67 v1(1031.43,3161.47) ; v1@1032.43,459.17 v1@1032.63,459.37 ; v1@1032.43,459.17 v1@1032.63,459.37 ; v1(1032.43,1107.47) 977.03,1107.47 v1(1032.43,1107.47) ; v1(1032.43,1280.17) 1032.63,1280.37 v1(1032.43,1280.17) ; v1(1032.43,2748.47) 1032.63,2748.67 v1(1032.43,2748.47) ; v1(1032.43,2921.17) 1032.63,2921.37 v1(1032.43,2921.17)
VREF_IN: 
VREF_IN_5370: 
VREF_OUT: 
VREF_OUT_6270: 
pads on no net: J3.41 J3.42 J3.49 J3.HOLE1 J3.HOLE2 J4.4 J4.5 J4.Hole29 J4.Hole30 J5.18 J5.23 J5.73 J5.HOLE1 J5.HOLE2 J6.12 J6.13 J6.14 J6.15 J6.16 J6.17 J6.18 MH1.1 MH2.1 MH3.1 MH4.1 MH5.1 MH6.1 RD30.2 RD50.2 RD80.2 RD120.2 UA2.7 UA4.7 UA5.7 UA7.7 UD3.7 UD7.7 UD11.7 UD15.7 UP1.6 UP1.7 UP2.6 UP2.7 UP3.6 UP3.7 UP5.8 UP7.2 UT31.16 UT32.4 UT32.9 UT32.11 UT32.12 UT32.26 UT32.27 UT32.29 UT32.30 UT32.32 UT32.33 UT32.35 UT35.23 UT50.23 UT70.9 UT72.9 UT73.7 UT73.8 UT73.9 UT73.10

## Polygon pours and split planes (outlines as drawn)
N1002964 on Top Layer "Top Layer-N1002964" (hatched Horizontal grid 7.5 track 8, remove dead copper, pour order 1000): 419.63,3554 519.63,3554 519.63,3384 419.63,3384
N192153 on Top Layer "Top Layer-N192153" (hatched Horizontal grid 7.5 track 8, pour order 1001): 754.63,3584 914.63,3584 914.63,3449 754.63,3449
N193110 on Mid-Layer 1 "Mid-Layer 1-N193110" (hatched Horizontal grid 7.5 track 8, remove dead copper, pour order 1002): 794.63,1594 939.63,1449 1344.63,1449 1344.63,1514 1229.63,1629 944.63,1629 944.63,1799 899.63,1844 629.63,1844 609.63,1824 609.63,1774 639.63,1744 644.63,1744
VCC3VP on Mid-Layer 1 "Mid-Layer 1-VCC3VP" (hatched Horizontal grid 7.5 track 8, remove dead copper, pour order 1003): 1739.63,1334 1859.63,1334 1909.63,1384 1909.63,1894 2049.63,2034 2049.63,2134 2124.63,2209 2401.77,2208.37 2454.27,2155.87 2454.63,1344 2299.63,1189 1804.63,1189 1739.63,1254
N192153 on Mid-Layer 1 "Mid-Layer 1-N192153" (hatched Horizontal grid 7.5 track 8, remove dead copper, pour order 1004): 829.63,3579 2039.63,3579 2039.63,3459 829.63,3459
N1002964 on Mid-Layer 2 "Mid-Layer 2-N1002964" (hatched Horizontal grid 7.5 track 8, remove dead copper, pour order 1005): 54.63,499 169.63,499 169.63,3314 344.63,3489 419.63,3489 419.63,3544 524.63,3544 524.63,3389 389.63,3389 339.63,3339 339.63,384 54.63,384
N570816 on Mid-Layer 2 "Mid-Layer 2-N570816" (hatched Horizontal grid 7.5 track 8, remove dead copper, pour order 1006): 599.63,1269 2099.63,1269 2099.63,1434 2194.63,1434 2194.63,1179 1304.63,1179 1294.63,1169 599.63,1169
VCC5VN on Mid-Layer 2 "Mid-Layer 2-VCC5VN" (hatched Horizontal grid 7.5 track 8, remove dead copper, pour order 1007): 1842.63,3629 3849.63,3629 3849.63,-1 1677.63,-1 1677.63,252 1722.63,297 1746.63,297 1760.63,311 1760.63,360 1715.63,405 1715.63,507 1744.63,536 1761.63,536 1781.63,556 1781.63,584 1759.63,606 1736.63,606 1718.63,624 1718.63,712 1764.63,758 1764.63,800 1723.63,841 1723.63,951 1779.63,1007 1779.63,1028 1781.63,1030 1758.63,1053 1742.63,1053 1726.63,1069 1726.63,1155.88 1746.63,1175.88 1816.63,1175.88 1828.63,1165 2206.63,1165 2206.63,1444 2092.63,1444 2092.63,1276 1829.63,1276 1829.63,1334 1829.27,1355.87 1976.77,1503.37 1976.77,2188.37 1842.63,2323
no net on Top Overlay (hatched 90Degree grid 7.5 track 8, remove dead copper): 12.5,3345 12.5,3360 45,3360 45,3380 85,3352.5 45,3325 45,3345
no net on Top Overlay (hatched 90Degree grid 7.5 track 8, remove dead copper): 15,1900 15,1915 47.5,1915 47.5,1935 87.5,1907.5 47.5,1880 47.5,1900
no net on Top Overlay (hatched 90Degree grid 7.5 track 8, remove dead copper): 4345,1335 4345,1350 4377.5,1350 4377.5,1370 4417.5,1342.5 4377.5,1315 4377.5,1335
no net on Top Paste (hatched Horizontal grid 2 track 2): 1865,1769 2040,1769 2040,1819 2090,1819 2090,2024 1865,2024
no net on Top Solder (hatched Horizontal grid 2 track 2): 1865,1769 2040,1769 2040,1819 2090,1819 2090,2024 1865,2024
GND_SIGNAL on Internal Plane 1 (split plane): 4389.98,1755.02 4390.37,1751.09 4391.51,1747.32 4393.37,1743.85 4395.87,1740.8 4398.92,1738.31 4402.39,1736.45 4406.16,1735.3 4410.08,1734.92 4901.75,1734.92 4901.75,188.08 4406.02,188.08 4402.09,187.7 4398.32,186.55 4394.85,184.69 4391.8,182.2 4389.31,179.15 4387.45,175.68 4386.3,171.91 4385.92,167.98 4385.92,19.08 19.08,19.08 19.08,3606.65 4389.98,3606.65
VCC5VP on Internal Plane 2 (split plane): 534 vertices, not listed, extent 1079.81,19.08 4901.75,3606.65
VDD_EXT on Internal Plane 2 (split plane): 1061.46,173.18 868.81,173.18 868.81,254 868.5,255.56 867.62,256.88 866.29,257.77 864.73,258.08 863.46,257.83 863.71,259.1 863.4,260.66 862.52,261.98 861.19,262.87 859.63,263.18 754.63,263.18 753.07,262.87 751.75,261.98 750.87,260.66 750.55,259.1 750.81,257.83 749.54,258.08 747.97,257.77 746.65,256.88 745.77,255.56 745.46,254 745.46,19.08 19.08,19.08 19.08,3606.65 1061.46,3606.65
N95032 on Internal Plane 2 (split plane): 850.46,164 850.77,162.44 851.65,161.12 852.97,160.23 854.54,159.92 855.81,160.17 855.55,158.9 855.87,157.34 856.75,156.02 858.07,155.13 859.63,154.82 1066.69,154.82 1067.15,154.92 1067.75,154.02 1069.07,153.13 1070.63,152.82 1650.46,152.82 1650.46,149 1650.77,147.44 1651.65,146.12 1652.97,145.23 1654.54,144.92 1655.81,145.17 1655.55,143.9 1655.87,142.34 1656.75,141.02 1658.07,140.13 1659.63,139.82 2640.46,139.82 2640.46,19.08 763.81,19.08 763.81,244.82 850.46,244.82
VDD_EXT on Internal Plane 2 (split plane): 1660.65,154.1 1659.63,154.1 1658.61,153.9 1658.61,156.9 1659.63,156.9 1660.65,157.1

## Keep-outs
Keep-Out Layer:
  lines w50: 0,0 0,3625.73 4409.07,3625.73 4409.07,1814.87 4410,1754 4920.83,1754 4920.83,169 4405,169 4405,-1 0,0
  text "KEEPOUT" at 2010,-1917.5 h100

## Other copper
Top Layer:
  rectangle net N1002964: 486.58,3381.5 522.13,3515.87
  rectangle net N192153: 754.92,3445.87 829.63,3513.13
  text "Board Dim: 92mm x 125mm" at 4861.62,436.7 h30 r90
  text "L1 (TOP) .GTL" at 434.63,-686.63 h100
Mid-Layer 1:
  text "VCC3V Analog" at 2264.62,3694 h37.5 r90
  text "L3 (ML1) .G1" at 434.63,-1086.63 h100
Mid-Layer 2:
  text "L5 (ML2) .G2" at 409.63,-1286.63 h100
Bottom Layer:
  text "L6 (BOT) .GBL" at 1319.63,-1714.13 h100
Internal Plane 1 (plane layer: these items are gaps in the copper):
  lines w0.03: 989.63,3629 1737.03,3629
  lines w10: -486.8,4.07 -261.8,4.07 ; -486.8,3625.73 -261.8,3625.73 ; -393.05,60.32 -374.3,4.07 ; -393.05,3569.48 -374.3,3625.73 ; -374.3,1626.98 -374.3,4.07 ; -374.3,2002.82 -374.3,3625.73 ; -355.55,60.32 -374.3,4.07 ; -355.55,3569.48 -374.3,3625.73 ; 0,-629.63 0,-404.63 ; 0,-348.47 0,-123.47 ; 56.25,-535.88 0,-517.13 ; 56.25,-498.38 0,-517.13 ; 56.25,-254.72 0,-235.97 ; 56.25,-217.22 0,-235.97 ; 993.63,3629 0,3629 0,-1 1029.63,-1 1679.63,-1 ; 1752.72,2830 1979.63,2831 2031.63,2779 2076.63,2779 2121.63,2824 3874.63,2824 4122.63,2576 4122.63,1759 4237.63,1644 4275,1644 ; 1764.63,764 1989.63,764 2019.63,734 2034.63,704 2099.63,704 2154.63,759 4167.63,759 4254.63,672 4280,672 ; 1784,1348.37 1879,1348.37 1962.13,1431.5 1962.13,1756.5 1893.63,1825 1893.63,2000.43 2028.13,2132.5 2053.63,2132.93 2125,2204.3 2125,2343 ; 1785.63,2343 2125,2343 ; 1962.13,1529 2179.63,1529 2197.63,1547 2293.63,1547 2318.63,1572 2480,1572 2490,1562 2490,1469 2530,1429 2530,1409 2600,1339 3840,1339 3906.63,1273 4176.63,1003 4176.63,869 4276.63,769 ; 2014.58,-235.97 0,-235.97 ; 2276.67,-517.13 0,-517.13 ; 2390.42,-235.97 4405,-235.97 ; 2495,1891 2550,1836 4000,1836 4000,1549 4115,1434 4115,1369 4285,1199 ; 2644.17,-517.13 4920.83,-517.13 ; 4261.63,1289 4201.63,1349 4201.63,1530 4046.63,1685 4046.63,2299 4001.63,2344 3835,2344 3850.63,2343 2125,2343 ; 4348.75,-254.72 4405,-235.97 ; 4348.75,-217.22 4405,-235.97 ; 4405,-348.47 4405,-123.47 ; 4864.58,-535.88 4920.83,-517.13 ; 4864.58,-498.38 4920.83,-517.13 ; 4920.83,-629.63 4920.83,-404.63 ; 5191.37,-1 5416.37,-1 ; 5191.37,1754 5416.37,1754 ; 5285.12,55.25 5303.87,-1 ; 5285.12,1697.75 5303.87,1754 ; 5287,169 5512,169 ; 5287,1754 5512,1754 ; 5303.87,696.92 5303.87,-1 ; 5303.87,1056.08 5303.87,1754 ; 5322.62,55.25 5303.87,-1 ; 5322.62,1697.75 5303.87,1754 ; 5380.75,225.25 5399.5,169 ; 5380.75,1697.75 5399.5,1754 ; 5399.5,781.92 5399.5,169 ; 5399.5,1141.08 5399.5,1754 ; 5418.25,225.25 5399.5,169 ; 5418.25,1697.75 5399.5,1754
  text "External Dirty GND" at 314.65,3689 h37.5 r90
  text "Digital GND" at 1349.65,3689 h37.5 r90
  text "Analog GND" at 2919.62,3689 h37.5 r90
  text "3622m" at -324.3,1683.23 h56.25 r90
  text "1585m" at 5349.5,1084.83 h56.25 r270
  text "1755m" at 5253.87,999.83 h56.25 r270
  text "4405m" at 2070.83,-285.97 h56.25
  text "4921m" at 2332.92,-567.13 h56.25
  text "L2 (GND) .GP1" at 402.13,-876.63 h100
Internal Plane 2 (plane layer: these items are gaps in the copper):
  lines w8: -4.9,0 -4.9,3625.73 ; 0,-4.9 751.73,-5.07 ; 0,3630.64 1065.86,3630.64 ; 749.54,-1 749.54,254 ; 754.63,259.1 859.63,259.1 ; 854.54,164 854.54,248.9 759.73,248.9 759.73,4.1 2644.54,4.1 2644.54,143.9 1659.63,143.9 ; 859.63,158.9 1066.69,158.9 ; 864.73,254 864.73,169.1 1065.54,169.1 1065.54,3629 ; 1070.63,156.9 1654.54,156.9 1654.54,149 ; 1659.63,169.1 1075.73,169.1 1075.73,3623.9 1730.54,3623.9 1730.54,3148 ; 1664.73,164 1664.73,154.1 1673.54,154.1 1673.54,253 ; 1676.03,257.6 1719.03,300.6 ; 1713.54,412 1713.54,508 ; 1715.03,511.6 1771.54,568.11 1771.54,585.89 1757.52,599.9 1741.63,599.9 ; 1715.54,626 1715.54,713 ; 1715.54,850 1715.54,945 ; 1717.03,622.4 1738.03,601.4 ; 1717.03,716.6 1759.54,759.11 1759.54,801.89 1722.03,839.4 ; 1717.03,846.4 1720.56,842.86 ; 1717.03,948.6 1776.54,1008.11 1776.54,1026.89 1758.52,1044.9 1742.63,1044.9 ; 1718.03,404.4 1759.54,362.89 1759.54,314.11 1748.52,303.1 1723.63,303.1 ; 1720.54,1067 1720.54,1203 ; 1722.03,1063.4 1725.03,1060.4 1736.03,1049.4 1739.03,1046.4 ; 1722.03,1206.6 1746.54,1231.11 1746.54,1319 ; 1727.54,2695 1727.54,2813 ; 1729.03,2691.4 1747.03,2673.4 ; 1729.03,2816.6 1749.54,2837.11 1749.54,2870.89 1733.03,2887.4 ; 1729.54,2893 1729.54,3026 ; 1731.03,3029.6 1787.54,3086.11 1787.54,3110.89 1771.52,3126.9 1750.63,3126.9 ; 1733.03,3142.4 1747.03,3128.4 ; 1748.03,1322.6 1750.56,1325.14 ; 1750.63,2671.9 1760.52,2671.9 1782.54,2649.89 1782.8,2625.83 1739.03,2585.6 1740.3,2388.33 1787.75,2342.88 2006.77,2343.91 2125,2342.5 2126.77,2203.91 1890,1968.91 1890,1830 1962.5,1757.5 1961.94,1431.31 1879.63,1349 1802.68,1353.71 ; 1752.03,1328.6 1771.03,1347.6 ; 1774.49,1349.07 1777.03,1351.6 ; 1780.63,1353.1 1801.77,1353.1
  lines w10: 1659.63,149 2649.63,149 2649.63,-1 754.63,-1 754.63,254 859.63,254 859.63,164 1659.63,164 ; 1659.63,162 1070.63,162 1070.63,3629 1735.63,3629 ; 1679.63,149 2654.63,149 2654.63,-1 4402.5,-1 4402.5,170 4922.63,170 4922.63,1755 4407.5,1755 4407.5,3629 1736.63,3629 ; 1774.63,1344 1879.63,1349 ; 1804.63,1349 1879.63,1349 ; 1962.5,1757.5 1961.94,1431.31 1879.63,1349
  text "VCC5p Analog" at 2780,3552.5 h37.5
  text "VDD3V Digital" at 1152.5,3545 h37.5
  text "L4 (PWR) .GP2" at 402.13,-1496.63 h100

## Silkscreen, mask and mechanical layers (free items; w line width, h text height)
Top Overlay:
  circle w12: c1709.63,1253.37 r6
  lines w5: 1479.63,991.37 1479.63,1583.37 ; 1397.63,219 4317.63,219 4317.63,3394 1397.63,3394 1397.63,219 ; 1482.63,304 4232.63,304 4232.63,3304 1482.63,3304 1482.63,304
  lines w6: 1695.63,1524 1720.63,1524 1738.63,1506 ; 2012.5,1562.5 2012.5,1580 ; 2075,1577.5 2082.5,1570 2082.5,1552.5
  lines w10: 1305.09,4347.47 ccw(c1353.5,4387) 1305.21,4347.33
  text "+6V" at 424.62,3548.98 h40
  text "McGill Digital fMUX Mezzanine" at 2684.63,3530.87 h45
  text "Rev 4 - Made in CANADA - Dec 2009" at 2681.05,3456.23 h33.75
  text "Matt Dobbs <Matt.Dobbs@McGill.ca>, George Zizka" at 2685.05,3400.73 h30
  text "Comb4" at 3899.63,3069 h37.5
  text "Carrier" at 3854.63,2999 h37.5
  text "Comb3" at 3864.63,2619 h37.5
  text "Nuller" at 3849.63,2554 h37.5
  text "Module B" at 4219.63,2384 h75 r90
  text "DemodB" at 3924.63,2004 h37.5
  text "+4V" at 509.62,1938.98 h30
  text "DemodA" at 3915,1480 h37.5
  text "Comb2" at 3849.63,984 h37.5
  text "Nuller" at 3849.63,924 h37.5
  text "Module A" at 4214.63,729 h75 r90
  text "Mount DB15f this side" at 4779.65,585.67 h30 r90
  text "Comb1" at 3869.63,494 h37.5
  text "Carrier" at 3829.63,434 h37.5
  text "____" at 16.28,246.22 h30 r90
  text "____" at 16.28,246.22 h30 r90
  text "GND" at 84.63,243.37 h40 r90
  text "-6V" at 332.13,58.37 h40
  text "EXT_GND" at 775,15 h35
  text "DIG_GND" at 1070,15 h35
  text "TOP IDENT (.GTO)" at 2394.63,-714.13 h100
Bottom Overlay:
  text "VCC5VP" at 2087.5,3546.5 h37.5
  text "Rev 4 - Made in CANADA - Dec 2009" at 4103.25,3409.38 h75 r90
  text "Copyright 2009" at 4348.67,3409.38 h75 r90
  text "Matt Dobbs <Matt.Dobbs@McGill.ca>, George Zizka" at 4210.92,3407.38 h56.25 r90
  text "McGill Digital fMUX Mezzanine" at 3962.67,3406.38 h75 r90
  text "TP" at 2925,3164 h30
  text "TP" at 2280,3109 h30
  text "Carrier" at 3836.72,3089 h37.5
  text "TP" at 2215,2999 h30
  text "Module B" at 3035.3,2845.83 h75 r90
  text "TP" at 2760,2809 h30
  text "TP" at 2910,2704 h30
  text "TP" at 2270,2649 h30
  text "Nuller" at 3847.95,2639 h37.5
  text "TP" at 2215,2549 h30
  text "TP" at 2755,2354 h30
  text "VDD3V" at 1462.5,2251.5 h37.5 r270
  text "TP" at 2710,2159 h30
  text "TP" at 3535,2154 h30
  text "Demod" at 3789.62,2134 h37.5
  text "TP" at 2750,1979 h30
  text "VCC3VP" at 2492.5,1866.5 h37.5 r270
  text "TP" at 3480,1829 h30
  text "TP" at 2710,1664 h30
  text "TP" at 3535,1659 h30
  text "Demod" at 3784.62,1639 h37.5
  text "TP" at 2775,1459 h30
  text "1" at 4472.97,1423.43 h30 r270
  text "TP" at 3485,1329 h30
  text "Module A" at 3032.8,1303.33 h75 r90
  text "TP" at 2900,1084 h30
  text "TP" at 2225,1029 h30
  text "Nuller" at 3790.3,1000.83 h37.5
  text "TP" at 2255,919 h30
  text "TP" at 2755,744 h30
  text "TP" at 2905,644 h30
  text "TP" at 2255,584 h30
  text "Carrier" at 3797.8,548.33 h37.5
  text "TP" at 2215,479 h30
  text "____" at 16.28,451.22 h30 r90
  text "____" at 16.28,451.22 h30 r90
  text "TP" at 2700,284 h30
  text "____" at 16.28,246.22 h30 r90
  text "LED AUX" at 1369.63,163.37 h37.5 r270
  text "VCC5VN" at 3016.57,53.07 h37.5
  text "BOTTOM IDENT (.GBO)" at 3902.13,-896.63 h100
Top Paste:
  text "TOP SOLDER PASTE (.GTP)" at 2402.13,-1316.63 h100
Bottom Paste:
  text "BOTTOM SOLDER PASTE (.GBP)" at 4542.13,-1716.63 h100
Top Solder:
  text "TOP SOLDER MASK (.GTS)" at 2382.13,-1096.63 h100
Bottom Solder:
  text "BOTTOM SOLDER MASK (.GBS)" at 4522.13,-1516.63 h100
Mechanical 1:
  lines w2: 4869.63,0 4920.83,0 4920.83,56.5 ; 4869.63,3625.73 4920.83,3625.73 4920.83,3579 ; 0,0 4405,0 4405,169 4920.83,169 4920.83,1754 4409.07,1754 4409.07,3625.73 0,3625.73 0,0
  text "McGill: DfMux Mezzanine Board  Rev4" at 467.5,4722.5 h100
  text "Nominal Size: 4.920 x 3.625 inches" at 543,4454 h100
  text "FINISHED BOARD: 0.062\" (Nom)  370HR" at 488,4196.5 h100
  text "ARRANGE LAYERS SEQUENTIALLY: L1-L6" at 528,3986.5 h100
  text "Thieving Copper Dots CAN be added to INNER layers if needed" at 8,3806.5 h80
  text "BOARD OUTLINE" at 412.5,-1912.5 h100
Drill Drawing:
  lines w5: 5620.93,3481.35 7471.32,3481.35
  lines w20: 5274.67,3139.5 5786.48,3139.5 ; 5287.17,3377 5798.98,3377 ; 5294.67,2852.5 5806.48,2852.5 ; 5297.17,2519.5 5808.98,2519.5 ; 5304.67,2064.5 5816.48,2064.5 ; 5305.57,2284.71 5817.38,2284.71
  text "370HR : 6 Layer PCB, Approximate Build:" at 4705,3562.5 h80
  text "TopLayer :0.5oz Plus Plating" at 5865.22,3363.24 h60
  text "L1" at 5105,3340 h80
  text "4.0 mils spacing" at 5708.11,3236.66 h60
  text "Plane 1: 1oz" at 5853.05,3114.2 h60
  text "L2" at 5107.5,3105 h80
  text "5.0 mils spacing" at 5708.11,2986.66 h60
  text "MidLayer1: 1/2oz" at 5844.76,2820.03 h60
  text "L3" at 5090,2817.5 h80
  text "Excess Material" at 5392.5,2635 h60
  text "MidLayer4: 1/2oz" at 5847.26,2487.03 h60
  text "L4" at 5102.5,2482.5 h80
  text "5.0 mils spacing" at 5730,2372.5 h60
  text "L5" at 5122.5,2252.5 h80
  text "Plane 2 : 1oz" at 5896.12,2245.34 h60
  text "4.0 mils spacing" at 5705,2152.5 h60
  text "Bottom Layer :0.5oz Plus Plating" at 5889.49,2045.38 h60
  text "L6" at 5122.5,2030 h80
  text "Total thickness = .093" at 5365.22,1905.57 h60
  text "ALL ROUTED LAYERS:" at 5515,1732.5 h60
  text "7 mils = 50 OHMS" at 5587.5,1612.5 h60
  text "FINISHED HOLE SIZES" at 5385,1382.5 h100
  text ".Legend" at 5172.13,-121.63 h100 r90
  text "DRILL DRAWING (.GD1)" at 2880,-1922.5 h100

## Text inside footprints (layer, text, board x,y; h text height)
J1: Top Overlay "1" at 920.35,158.12 h22.5